# Altium PCB PICkit_2.PcbDoc (part 1 of 2)
Units mil, origin at the board's own origin, x right, y up, seen from the top; angles counter-clockwise.
Board outline 6000 x 4000 mil, 2 copper layers (Top Layer, Bottom Layer); 48 components, 38 nets, 142 pads, 0 vias.
Unrouted connection lines stored in the file: 48.
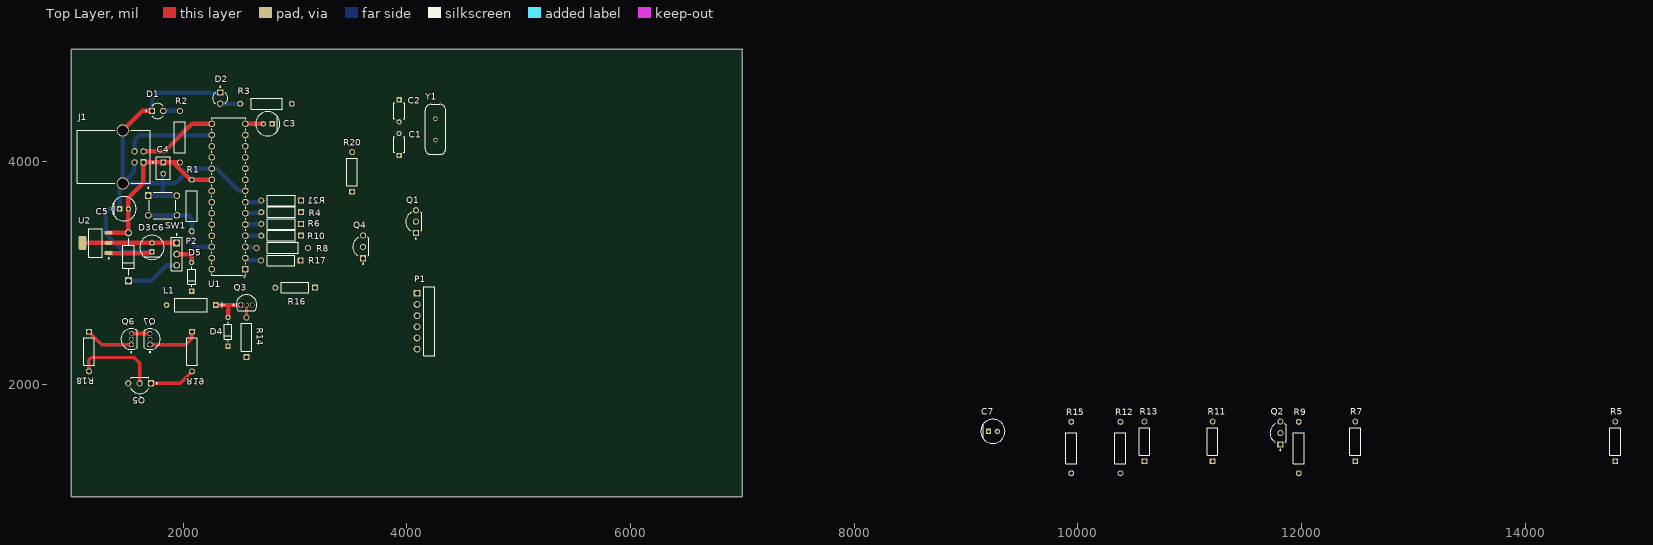
[diagram p0: Top Layer view]
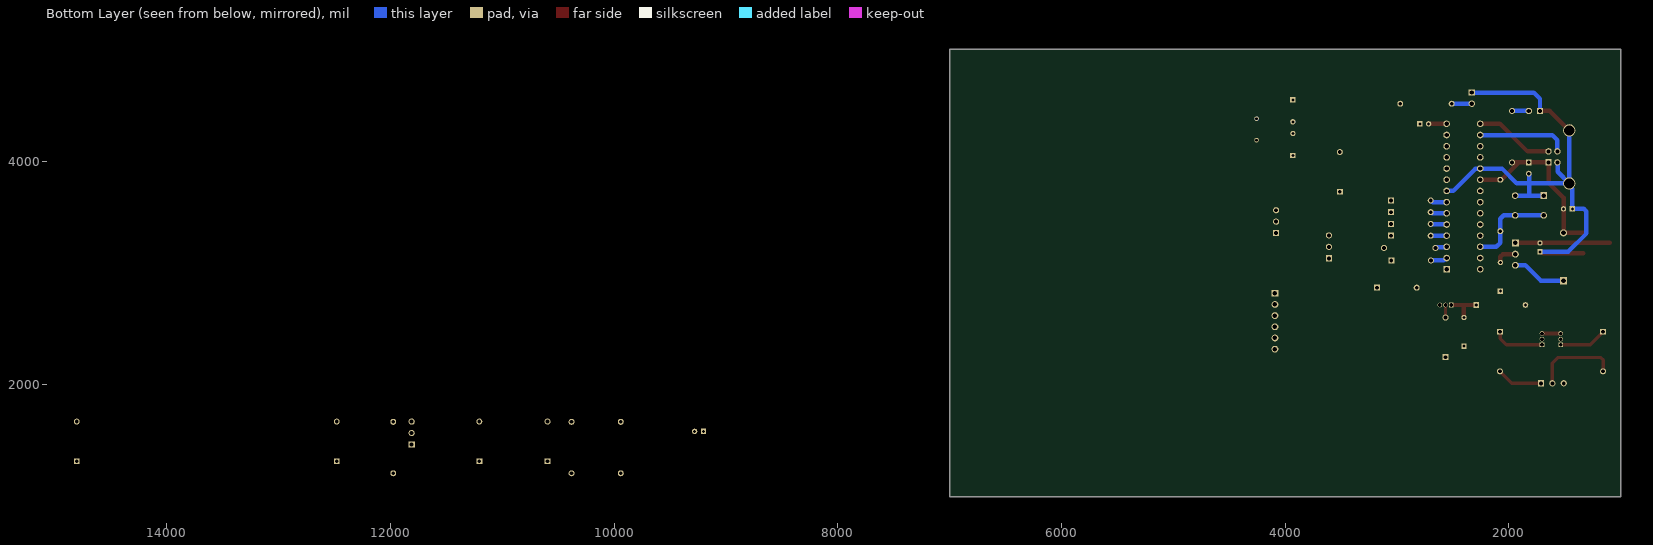
[diagram p1: Bottom Layer view, seen from below]

## Layer stack, top to bottom
Top Solder: solder mask 0.4, Solder Resist, Dk 3.5
Top Layer: signal copper 1.4
Dielectric 1: dielectric 12.6, FR-4, Dk 4.8
Bottom Layer: signal copper 1.4
Bottom Solder: solder mask 0.4, Solder Resist, Dk 3.5

## Board outline
1000,1000 7000,1000 7000,5000 1000,5000

## Design rules (kind name [scope] priority, off if disabled: settings)
Clearance [All] p1: gap=10 ignorepadtopadclearanceinfootprint=FALSE except(0: Arc-Hole Track-Hole SMDPad-Hole THPad-Hole Via-Hole Fill-Hole Poly-Hole Region-Hole Text-Hole; 8: Arc-SMDPad Arc-THPad Track-SMDPad Track-THPad SMDPad-SMDPad SMDPad-THPad THPad-THPad)
PolygonConnect [All] p1: connectstyle=Relief reliefconductorwidth=10 reliefentries=4 polygonreliefangle="90 Angle" airgapwidth=10
RoutingVias [All] p1: holewidth=28 width=50 viastyle="Through Hole" minholewidth=28 minwidth=50 maxholewidth=28 maxwidth=50
SolderMaskExpansion [All] p1: expansion=4 istentingtop=FALSE
Width [All] p1: maxlimit=200 minlimit=10 preferedwidth=30 minimp=50.000000 maximp=50.000000 favimp=50.000000
30 further rules are at their usual default settings.

## Components (designator, comment, footprint, x,y, rotation, side; value= is the part's Value field where it differs from the comment)
C1 "RCE5C1H220J0K1H03B" FP-RCE0K1-MFG 3930,4150 r90 top
C2 "RCE5C1H220J0K1H03B" FP-RCE0K1-MFG 3930,4451.57 r270 top
C3 "EEUHD1H1R0" FP-RAD-TH-D_5_0_5-L_11_1-MFG 2755,4335 r180 top
C4 "C320C104K5R5TA" CAPR51-254-508X318X736 1820,3940 r270 top
C5 "ECA1HHG100I" FP-RAD-TH-D_5_0_5-L_11_1-MFG 1470,3575 r0 top
C6 "ECA1CM220B" FP-RAD-TH-D_5_0_5-L_11_1-MFG 1720,3230 r90 top
C7 "EEUFM1E470" FP-RAD-TH-D_5_0_5-L_11_1-MFG 9240,1585 r0 top
D1 "HLMP-1719" FP-HLMP-1719-MFG 1770,4450 r0 top
D2 "HLMP-1719" FP-HLMP-1719-MFG 2330,4565 r270 top
D3 "1N5817" FP-DO-41-MFG 1510,3145.91 r90 top
D4 "1N4148" FP-6_560-5004_12-4-MFG 2400,2475 r90 top
D5 "1N4148" FP-6_560-5004_12-4-MFG 2075,2967.05 r90 top
J1 "SS-52300-001" SS-52300-001 1551.02,4039.21 r270 top
L1 "78F681J-RC" IND_BOURNS_78F 2290,2715 r180 top
P1 "ISCP" SMTC-TSW-106-08-X-S-RA 4090,2820 r270 top
P2 "22-28-4033" MOLX-22-28-4033_V 1940,3170 r270 top
Q1 "BC558A" ONSC-TO-92-3-29-11_AM_BL 4080,3460 r90 top
Q2 "BC558A" ONSC-TO-92-3-29-11_AM_BL 11810,1570 r90 top
Q3 "BC548B" ONSC-TO-92-3-29-11 2565,2715 r0 top
Q4 "BC558A" ONSC-TO-92-3-29-11_AM_BL 3607.64,3235.19 r90 top
Q5 "BC558A" ONSC-TO-92-3-29-11_AM_BL 1610,2015 r180 top
Q6 "BC548B" ONSC-TO-92-3-29-11 1535,2410 r90 top
Q7 "BC548B" ONSC-TO-92-3-29-11 1702.21,2410 r90 top
R1 "CF14JT10K0" CF14JT10K0 2075,3600 r90 top
R2 "1-1623728-6" CF14JT10K0 1970,4215 r90 top
R3 "1-1623728-6" CF14JT10K0 2745,4515 r180 top
R4 "MFR-25FBF52-1K" RESA60-630X240 2875,3545 r180 top
R5 "MFR-25FBF52-1K" RESA60-630X240 14805,1495 r90 top
R6 "MFR-25FBF52-1K" RESA60-630X240 2875,3440 r180 top
R7 "MFR-25FBF52-1K" RESA60-630X240 12480,1495 r90 top
R8 "" CF14JT10K0 2890,3225 r180 top
R9 "" CF14JT10K0 11975,1435 r90 top
R10 "MFR-25FBF52-1K" RESA60-630X240 2875,3335 r180 top
R11 "MFR-25FBF52-1K" RESA60-630X240 11205,1495 r90 top
R12 "" CF14JT10K0 10380,1435 r90 top
R13 "MFR-25FBF52-1K" RESA60-630X240 10595,1495 r90 top
R14 "MFR-25FBF52-1K" RESA60-630X240 2565,2425.79 r90 top
R15 "" CF14JT10K0 9940,1435 r90 top
R16 "MFR-25FBF52-1K" RESA60-630X240 3000,2870 r180 top
R17 "MFR-25FBF52-1K" RESA60-630X240 2872.54,3113.99 r180 top
R18 "MFR-25FBF52-1K" RESA60-630X240 1155.97,2298.78 r270 top
R19 "MFR-25FBF52-1K" RESA60-630X240 2078.89,2298.78 r270 top
R20 "MFR-25FBF52-1K" RESA60-630X240 3510,3905 r90 top
R21 "MFR-25FBF52-1K" RESA60-630X240 2875,3650 r180 top
SW1 "TS02-66-60-BK-100-LCR-D" SW_TS02-66-60-BK-100-LCR-D 1815,3605 r0 top
U1 "PIC18F2550-I/SP" PIC18F2550-I/SP 2555,3035 r180 top
U2 "AZ1117IH-3.3TRG1" FP-SOT223-IPC_B 1215,3270 r180 top
Y1 "ECS-200-20-4X" XTAL_ECS-200-20-4X 4255,4285 r90 top

## Footprints (in the part's own frame and the unit in brackets; to place one, negate y for a bottom-side part, rotate by r counter-clockwise, add the part's x,y. Pads: shape width x height; smd on the part's side, far side on the other; paste and mask are expansions set on the pad)
CAPR51-254-508X318X736 [mm] "THD, 2-Leads, Body 5.08x3.18mm"
  rect 1.3x1.3 hole 0.8: 1(-1.27,0)
  round 1.3 hole 0.8: 2(1.27,0)
  silkscreen extent -2.54,-1.59 2.54,1.59, body extent -2.54,-1.59 2.54,1.59, height 7.36
CF14JT10K0 [mm]
  round 1.35 hole 0.85: 1(-5.715,0) 2(5.969,0)
  silkscreen extent -3.5,-1.25 3.5,1.25, body extent -6.02,-1.29 6.27,1.29, height 2.59
FP-6_560-5004_12-4-MFG [mm]
  rect 1.2x1.2 hole 0.7 paste-1000 mask+0: 1(-3.25,0)
  round 1.2 hole 0.7 paste-1000 mask+0: 2(3.25,0)
  silkscreen extent -2.25,-0.87 2.25,0.87, body extent -3.95,-0.97 3.95,0.97, height 0.25
FP-DO-41-MFG [mm]
  rect 1.6x1.6 hole 1.05 paste-1000 mask+0: 1(-5.438,0)
  round 1.6 hole 1.05 paste-1000 mask+0: 2(5.438,0)
  silkscreen extent -4.24,-1.36 4.24,1.36
FP-HLMP-1719-MFG [mm]
  rect 1.45x1.45 hole 0.95 paste-1000 mask+0: 1(-1.27,0)
  round 1.45 hole 0.95 paste-1000 mask+0: 2(1.27,0)
  silkscreen extent -2.67,-1.71 1.3,1.71, body extent -2.22,-2.22 2.22,2.22, height 0.25
FP-RAD-TH-D_5_0_5-L_11_1-MFG [mm]
  rect 1.2x1.2 hole 0.7 paste-1000 mask+0: 1(-1,0)
  round 1.2 hole 0.7 paste-1000 mask+0: 2(1,0)
  silkscreen extent -2.75,-2.75 2.75,2.75, body extent -2.85,-2.85 2.85,2.85, height 0.25
FP-RCE0K1-MFG [mm]
  rect 1.2x1.2 hole 0.7 paste-1000 mask+0: 1(-2.5,0)
  round 1.2 hole 0.7 paste-1000 mask+0: 2(2.5,0)
  silkscreen extent -1.8,-1.25 1.8,1.25, body extent -3.2,-1.35 3.2,1.35, height 0.25
FP-SOT223-IPC_B [mm]
  rect 1.86x0.872 smd paste+0 mask+0: 1(-2.976,2.3)
  rrect100% 1.86x0.872 smd paste+0 mask+0: 2(-2.976,0) 3(-2.976,-2.3)
  rrect47% 1.86x3.172 smd paste+0 mask+0: 4(2.976,0)
  silkscreen extent -3.1,-3.25 1.5,3.62, body extent -4.16,-3.5 4.16,3.5, height 0.25
IND_BOURNS_78F [mil]
  rect 50x50 hole 30 mask+0: 1(0,0)
  round 50 hole 30 mask+0: 2(440,0)
  silkscreen extent -85,-60 365,60, body extent -10,-55 450,55, height 110
MOLX-22-28-4033_V [mm] "THD, 3-Leads, Body 7.62x2.49mm, Pitch 2.54mm"
  rect 1.55x1.55 hole 1.02: 1(-2.54,0)
  round 1.55 hole 1.02: 2(0,0) 3(2.54,0)
  silkscreen extent -4.58,-1.24 3.81,1.24, body extent -3.81,-1.24 3.81,1.24, height 8.38
ONSC-TO-92-3-29-11 [mm] "TO, 3-Leads, Body Dia 4.7mm, Pitch 1.27mm"
  rect 1.05x1.05 hole 0.8: 1(-1.27,0)
  round 1.05 hole 0.8: 2(0,0) 3(1.27,0)
  silkscreen extent -3.07,-1.34 2.35,2.35, body extent -2.35,-1.33 2.36,2.36, height 7.87
ONSC-TO-92-3-29-11_AM_BL [mm] "TO, 3-Leads, Body Dia 4.7mm, Pitch 2.6mm"
  rect 1.4x1.4 hole 0.9: 1(-2.6,0)
  round 1.4 hole 0.9: 2(0,0) 3(2.6,0)
  silkscreen extent -3.97,-1.34 2.13,2.35, body extent -2.84,-1.34 2.84,2.35, height 5.33
PIC18F2550-I/SP [mil] "PIC18F2550-I/SP"
  rect 59x59 hole 39 mask+0: 1(0,0)
  round 59 hole 39 mask+0: 2(0,-100) 3(0,-200) 4(0,-300) 5(0,-400) 6(0,-500) 7(0,-600) 8(0,-700) 9(0,-800) 10(0,-900) 11(0,-1000) 12(0,-1100) 13(0,-1200) 14(0,-1300) 15(300,-1300) 16(300,-1200) 17(300,-1100) 18(300,-1000) 19(300,-900) 20(300,-800) 21(300,-700) 22(300,-600) 23(300,-500) 24(300,-400) 25(300,-300) 26(300,-200) 27(300,-100) 28(300,0)
  silkscreen extent -3,-1355 303,55, body extent -5,-1350 314,50, height 205
RESA60-630X240 [mm] "Axial Resistor, 2-Leads, Dia 2.4mm, Body Length 6.3mm"
  rect 1.35x1.35 hole 0.85: 1(-4.5,0)
  round 1.35 hole 0.85: 2(4.5,0)
  silkscreen extent -3.15,-1.2 3.15,1.2, body extent -3.15,-1.2 3.15,1.2, height 2.4
SMTC-TSW-106-08-X-S-RA [mm] ".025 SQ Post Terminal Strip Assembly, 1x6 Pins, Right Angle, 2.54mm Pitch, Male"
  rect 1.55x1.55 hole 1.02: 1(0,0)
  round 1.55 hole 1.02: 2(2.54,0) 3(5.08,0) 4(7.62,0) 5(10.16,0) 6(12.7,0)
  silkscreen extent -1.46,1.52 14.16,4.06, body extent -1.27,-0.32 13.97,9.9, height 3.05
SS-52300-001 [mm] "USB-B (USB TYPE-B) USB 2.0 Receptáculo Conector 4 Posiciones Orificio pasante"
  rect 1.45x1.45 hole 0.92: 1(1.25,2.355)
  round 1.45 hole 0.92: 2(-1.25,2.355) 3(-1.25,0.355) 4(1.25,0.355)
  round 2.8 hole 2.3: 5(6.02,-2.355) 6(-6.02,-2.355)
  silkscreen extent -6.02,-12.63 6.02,4.64, body extent -7.44,-12.7 7.49,3.8, height 11.25
SW_TS02-66-60-BK-100-LCR-D [mm]
  rect 1.508x1.508 / inner round 1.508 / far side rect 1.508x1.508 hole 1: 1(-3.25,2.25)
  round 1.508 hole 1: 2(3.25,2.25) 3(-3.25,-2.25) 4(3.25,-2.25)
  silkscreen extent -3.35,-3 3,4.1, body extent -3.95,-2.95 3.95,3.05, height 6
XTAL_ECS-200-20-4X [mm]
  round 1.03 hole 0.63: 1(-2.44,0) 2(2.44,0)
  silkscreen extent -5.68,-2.33 5.68,2.33, body extent -5.68,-2.32 5.68,2.32, height 3.5

## Part data
C1 C2: library part CMP-06035-047580-1, "Cap Ceramic 22pF 50V C0G ±5% Radial 5mm +125°C Automotive Bulk", Capacitance=22pF, Case/Package=Radial, Dielectric=C0G, Manufacturer=Murata, Max Operating Temperature=125°C, Min Operating Temperature=-55°C, Package Quantity=500, Ratings=AEC-Q200, Resistor Type=Ceramic, Supplier Part Number 1=490-12836-ND, Tolerance=5%, Voltage Rating=50V, Category="Ceramic Capacitors", ComponentLink1Description=https://datasheet.ciiva.com/18700/product-18700305.pdf?src-supplier=Digi-Key, ComponentLink1URL=https://datasheet.ciiva.com/18700/product-18700305.pdf?src-supplier=Digi-Key, Height=3.5mm, Height - Seated (Max)=0.138inch, Lead Diameter=0.5mm, Lead Pitch=0.197inch, Lead/Base Style="Formed Leads", Length=0.142inch, Manufacturer Part Number=RCE5C1H220J0K1H03B, Mount="Through Hole", Packaging=Bulk, Pricing 1="1=0.47000, 10=0.33100, 50=0.25020, 100=0.21790, 500=0.16140, 1000=0.13719, 2500=0.12912, 5000=0.12105 (USD)", RoHS=Yes, RoHS Compliant=Yes, Stock 1=685, Supplier 1=Digi-Key, Termination=Radial, Voltage Rating (DC)=50V, Width=0.098inch
C3: library part CMP-05427-001020-1, "Aluminum Electrolytic Capacitors (Radial Lead Type) AEC-Q200 Qualified 1uF ±20% 50V", Capacitance=1uF, Case/Package=Radial, Max Operating Temperature=105°C, Min Operating Temperature=-55°C, Package Quantity=200, Ripple Current=10mA, Tolerance=20%, Voltage=50V, Construction=RADIAL, Diameter=5mm, Height=11mm, Height - Seated (Max)=0.492inch, Lead Diameter=0.5mm, Lead Pitch=2.5mm, Lead/Base Style=Straight, Length=12.5mm, Life (Hours)=1000Hour, Mount="Through Hole", Number of Pins=2, Packaging=Bulk, Polarity=Polar, REACH SVHC="No SVHC", Ripple Current (AC)=10mA, RoHS Compliant=Yes, Series=HD, Termination=Radial, Voltage Rating=50V, Voltage Rating (DC)=50V
C4: library part CMP-1664-00004-1, "Radial Leaded Multilayer Ceramic Capacitor, 0.1 uF, +/- 10%, 50 V, -55 to 125 degC, 2-Pin THD, RoHS, Tape and Reel", Capacitance=100nF, Case/Package=Radial, Case\Package=SOT-23-5, Dielectric=X7R, Dielectric Material=Ceramic, Dropout Voltage="260 mV", Manufacturer=KEMET, Max Input Voltage="8 V", Max Operating Temperature="85 degC", Max Power Dissipation="250 mW", Min Operating Temperature="-40 degC", Output Current="150 mA", Output Voltage="5 V", Package Quantity=3000, Supplier Part Number 1=399-4264-ND, Tolerance=10%, Voltage=50V, Category="Ceramic Capacitors", ComponentLink1Description="Manufacturer URL", ComponentLink1URL=http://www.kemet.com/, ComponentLink2Description=Datasheet, ComponentLink2URL=http://www.kemet.com/docfinder?Partnumber=C320C104K5R5TA, ComponentLink3Description=https://datasheet.ciiva.com/7817/1732702-7817354.pdf?src-supplier=Element14, ComponentLink3URL=https://datasheet.ciiva.com/7817/1732702-7817354.pdf?src-supplier=Element14, ComponentLink4Description=https://datasheet.ciiva.com/27052/1570161-27052544.pdf?src-supplier=Jameco, ComponentLink4URL=https://datasheet.ciiva.com/27052/1570161-27052544.pdf?src-supplier=Jameco, ComponentLink5Description=https://datasheet.ciiva.com/11786/0900766b80717e24-11786584.pdf?src-supplier=RSComponents, ComponentLink5URL=https://datasheet.ciiva.com/11786/0900766b80717e24-11786584.pdf?src-supplier=RSComponents, ComponentLink6Description=https://datasheet.ciiva.com/39122/f3101-goldmax-39122993.pdf?src-supplier=Onlinecomponents.com, ComponentLink6URL=https://datasheet.ciiva.com/39122/f3101-goldmax-39122993.pdf?src-supplier=Onlinecomponents.com, ComponentLink7Description=https://datasheet.ciiva.com/7817/f3101-goldmax-7817514.pdf?src-supplier=Element14, ComponentLink7URL=https://datasheet.ciiva.com/7817/f3101-goldmax-7817514.pdf?src-supplier=Element14, ComponentLink8Description=https://datasheet.ciiva.com/14585/70095037-14585005.pdf?src-supplier=Allied+Electronics, ComponentLink8URL=https://datasheet.ciiva.com/14585/70095037-14585005.pdf?src-supplier=Allied+Electronics, ComponentLink9Description=https://datasheet.ciiva.com/5389/f3101-goldmax-334604-5389886.pdf?src-supplier=Mouser, ComponentLink9URL=https://datasheet.ciiva.com/5389/f3101-goldmax-334604-5389886.pdf?src-supplier=Mouser, Construction=RADIAL, DatasheetVersion=Dec-15, Depth=3.18mm, Dissipation Factor=2.5%, Height="1.3 mm", Height - Seated (Max)=0.26inch, Lead Diameter=0.51mm, Lead Free="Lead Free", Lead Length=7mm, Lead Pitch=2.54mm, Lead/Base Style=Straight, Length="3 mm", Manufacturer Part Number=C320C104K5R5TA, Mount="Surface Mount", Number of Pins=2, Outputs=1, PackageDescription="2-Pin Through Hole Device, Body 5.08 x 3.18 mm, Pitch 2.54 mm", PackageReference=CAPR51-254-508X318X736, Packaging="Tape and Reel", Pins=5, Pricing 1="1=0.22000, 10=0.15200, 50=0.10100, 100=0.08580, 500=0.06060, 1000=0.05302, 2500=0.05050, 5000=0.04671 (USD)", Radiation Hardening=No, Reach SVHC Compliant=Yes, Resistor Type=Ceramic, RoHS=Yes, RoHS Compliant=Yes, RoHSCompliant=true, Series="GoldMax 300 Comm X7R", Stock 1=268489, Supplier 1=Digi-Key, Termination=Radial, Voltage Rating=50V, Voltage Rating (DC)=50V, Width="1.8 mm"
C5: library part CMP-05427-000260-1, "Aluminum Electrolytic Capacitors (Radial Lead Type) AEC-Q200 Qualified 10uF ±20% 50V", Capacitance=10uF, Case/Package=Radial, Leakage Current=3uA, Manufacturer=Panasonic, Max Operating Temperature=105°C, Min Operating Temperature=-55°C, Package Quantity=2000, Ripple Current=39mA, Supplier Part Number 1=P19445CT-ND, Tolerance=20%, Voltage Rating=50V, Category="Aluminum Electrolytic Capacitors", ComponentLink1Description=https://datasheet.ciiva.com/26882/getdatasheetpartid-479260-26882746.pdf?src-supplier=Verical, ComponentLink1URL=https://datasheet.ciiva.com/26882/getdatasheetpartid-479260-26882746.pdf?src-supplier=Verical, ComponentLink2Description=https://datasheet.ciiva.com/11680/aba0000ce26-11680984.pdf?src-supplier=Avnet, ComponentLink2URL=https://datasheet.ciiva.com/11680/aba0000ce26-11680984.pdf?src-supplier=Avnet, Construction=RADIAL, Contact Plating=Tin, Diameter=5mm, Height=11mm, Height - Seated (Max)=0.472inch, Lead Diameter=0.5mm, Lead Free="Lead Free", Lead Pitch=2.5mm, Lead/Base Style=Straight, Length=11mm, Life (Hours)=1000Hour, Manufacturer Part Number=ECA1HHG100I, Mount="Through Hole", Packaging="Ammo Pack", Polarity=Polar, Pricing 1="1=0.33000, 10=0.22800, 50=0.15200, 100=0.12920, 500=0.09120, 1000=0.07980 (USD)", Radiation Hardening=No, RoHS=Yes, RoHS Compliant=Yes, Series=NHG, Stock 1=46120, Supplier 1=Digi-Key, Termination=Radial, Voltage Rating (DC)=50V
C6: library part CMP-05427-000115-1, "Aluminum Electrolytic Capacitors (Radial Lead Type) 22uF ±20% 16V", Capacitance=22uF, Case/Package=Radial, Manufacturer=Panasonic, Manufacturer Part Number=ECA-1CM220B, Max Operating Temperature=85°C, Min Operating Temperature=-40°C, Package Quantity=2000, Ripple Current=75mA, Supplier Part Number 1=10-ECA-1CM220BCT-ND, Tolerance=20%, Voltage Rating=16V, Category="Aluminum Electrolytic Capacitors", ComponentLink1Description=http://www.mouser.com/ds/2/315/ABA0000C1218-1131230.pdf?src-supplier=Mouser, ComponentLink1URL=http://www.mouser.com/ds/2/315/ABA0000C1218-1131230.pdf?src-supplier=Mouser, ComponentLink2Description=http://www.onlinecomponents.com/datasheet/eca-1cm220b.aspx?p=44446502&src-supplier=Onlinecomponents.com, ComponentLink2URL=http://www.onlinecomponents.com/datasheet/eca-1cm220b.aspx?p=44446502&src-supplier=Onlinecomponents.com, ComponentLink3Description=https://media.digikey.com/pdf/Data%20Sheets/Panasonic%20Capacitors%20PDFs/ECA-xxM%20Spec.pdf?src-supplier=Digi-Key, ComponentLink3URL=https://media.digikey.com/pdf/Data%20Sheets/Panasonic%20Capacitors%20PDFs/ECA-xxM%20Spec.pdf?src-supplier=Digi-Key, ComponentLink4Description=http://industrial.panasonic.com/www-data/pdf/ABA0000/ABA0000CE12.pdf?src-supplier=Avnet, ComponentLink4URL=http://industrial.panasonic.com/www-data/pdf/ABA0000/ABA0000CE12.pdf?src-supplier=Avnet, Diameter=5mm, Height=11mm, Height - Seated (Max)=0.472inch, Lead Diameter=0.5mm, Lead Pitch=5mm, Lead/Base Style=Straight, Length=11mm, Life (Hours)=2000Hour, Mount="Through Hole", Packaging="Ammo Pack", Polarity=Polar, Pricing 1="1=0.28000, 10=0.19300, 50=0.11580, 100=0.09780, 500=0.06696, 1000=0.05922 (USD)", Radiation Hardening=No, RoHS=Yes, RoHS Compliant=Yes, Series=M, Stock 1=5985, Supplier 1=Digi-Key, Termination=Radial, Voltage Rating (DC)=16V
C7: library part CMP-05427-000601-1, "Aluminum Electrolytic Capacitors (Radial Lead Type) 47uF ±20% 25V", Capacitance=47uF, Case/Package=Radial, ESR (Equivalent Series Resistance)=300mR, Manufacturer=Panasonic, Max Operating Temperature=105°C, Min Operating Temperature=-40°C, Package Quantity=200, Ripple Current=280mA, Supplier Part Number 1=P12923-ND, Tolerance=20%, Voltage=25V, Category="Aluminum Electrolytic Capacitors", ComponentLink1Description=https://datasheet.ciiva.com/11777/0900766b805f3abe-11777793.pdf?src-supplier=RSComponents, ComponentLink1URL=https://datasheet.ciiva.com/11777/0900766b805f3abe-11777793.pdf?src-supplier=RSComponents, ComponentLink2Description=https://datasheet.ciiva.com/46396/654842-46396775.pdf?src-supplier=Element14, ComponentLink2URL=https://datasheet.ciiva.com/46396/654842-46396775.pdf?src-supplier=Element14, ComponentLink3Description=https://datasheet.ciiva.com/11680/aba0000ce108-11680078.pdf?src-supplier=Avnet, ComponentLink3URL=https://datasheet.ciiva.com/11680/aba0000ce108-11680078.pdf?src-supplier=Avnet, ComponentLink4Description=https://datasheet.ciiva.com/92/aba0000ce108-92343.pdf?src-supplier=Digi-Key, ComponentLink4URL=https://datasheet.ciiva.com/92/aba0000ce108-92343.pdf?src-supplier=Digi-Key, ComponentLink5Description=https://datasheet.ciiva.com/48542/eeufm-series-eng-tds-48542709.pdf?src-supplier=Distrelec, ComponentLink5URL=https://datasheet.ciiva.com/48542/eeufm-series-eng-tds-48542709.pdf?src-supplier=Distrelec, ComponentLink6Description=https://datasheet.ciiva.com/43458/654842-43458220.pdf?src-supplier=Farnell, ComponentLink6URL=https://datasheet.ciiva.com/43458/654842-43458220.pdf?src-supplier=Farnell, Construction=RADIAL, Contact Plating=Tin, Diameter=5mm, Dissipation Factor=0.14%, Features="General Purpose", Height=11mm, Height - Seated (Max)=0.433inch, Impedance=300mR, Lead Diameter=0.5mm, Lead Free="Lead Free", Lead Pitch=2mm, Length=11mm, Life (Hours)=2000Hour, Manufacturer Part Number=EEUFM1E470, Mount="Through Hole", Number of Pins=2, Packaging=Bulk, Pricing 1="1=0.43000, 10=0.29200, 50=0.19440, 100=0.16530, 500=0.11670, 1000=0.10211, 2500=0.09725, 5000=0.08996 (USD)", Radiation Hardening=No, REACH SVHC="No SVHC", Reach SVHC Compliant=Yes, Ripple Current (AC)=280mA, RoHS=Yes, RoHS Compliant=Yes, Series=FM, Stock 1=2, Supplier 1=Digi-Key, Termination=Radial, Voltage Rating=25V, Voltage Rating (DC)=25V
D1: library part CMP-2000-06410-2, "LED YELLOW DIFFUSED T-1 T/H", Case/Package=T, Color=Yellow, Colour=Power, Forward Current=2mA, Forward Voltage=1.8V, Manufacturer=Broadcom, Max Operating Temperature=100°C, Max Power Dissipation=17.5mW, Min Operating Temperature=-40°C, Package=0, Package Quantity=2000, Reverse Voltage=5V, Supplier Part Number 1=516-1309-ND, Temperature="-40°C to +100°C", Temperature Range High=+100°C, Automotive=No, Category=Diode, ComponentLink1Description=https://datasheet.ciiva.com/1244/1715378-1244676.pdf?src-supplier=Element14, ComponentLink1URL=https://datasheet.ciiva.com/1244/1715378-1244676.pdf?src-supplier=Element14, ComponentLink2Description=Datasheet, ComponentLink2URL=https://docs.broadcom.com/docs/AV02-1557EN, ComponentLink3Description=https://datasheet.ciiva.com/15117/getdatasheetpartid-111138-15117505.pdf?src-supplier=Verical, ComponentLink3URL=https://datasheet.ciiva.com/15117/getdatasheetpartid-111138-15117505.pdf?src-supplier=Verical, ComponentLink4Description=https://datasheet.ciiva.com/11773/0900766b800204ad-11773897.pdf?src-supplier=RSComponents, ComponentLink4URL=https://datasheet.ciiva.com/11773/0900766b800204ad-11773897.pdf?src-supplier=RSComponents, ComponentLink5Description=https://datasheet.ciiva.com/19482/253673-19482303.pdf?src-supplier=Jameco, ComponentLink5URL=https://datasheet.ciiva.com/19482/253673-19482303.pdf?src-supplier=Jameco, ComponentLink6Description=https://datasheet.ciiva.com/29334/180618-da-01-en-led-3mm-hlmp-1719-gelb-29334897.pdf?src-supplier=Conrad, ComponentLink6URL=https://datasheet.ciiva.com/29334/180618-da-01-en-led-3mm-hlmp-1719-gelb-29334897.pdf?src-supplier=Conrad, ComponentLink7Description=https://datasheet.ciiva.com/14605/70157746-14605453.pdf?src-supplier=Allied+Electronics, ComponentLink7URL=https://datasheet.ciiva.com/14605/70157746-14605453.pdf?src-supplier=Allied+Electronics, ComponentLink8Description=https://datasheet.ciiva.com/14183/efhlmp17x-47xx-en-14183894.pdf?src-supplier=Distrelec, ComponentLink8URL=https://datasheet.ciiva.com/14183/efhlmp17x-47xx-en-14183894.pdf?src-supplier=Distrelec, Contact Plating=Tin,Matte, Depth=3.43mm, Device Class L1=Optoelectronics, Device Class L2=LEDs, Device Class L3=unset, Diameter=3mm, Digikey Description="LED YELLOW DIFFUSED T-1 T/H", Dominant Wavelength=585nm, Height=6.35mm, Illumination Color=Yellow, Lead Free=Yes, Lead Length=24mm, Led Orientation=Straight, Length=3.43mm, Lens Color=Yellow, Lens Size=3mm, Lens Style=Dome,Round,Circular,Diffused,Colored, Lens Transparency=Diffused, Luminous Intensity=2.1mcd, Manufacturer Part Number=HLMP-1719, Mount="Through Hole", Mouser Description="Standard LEDs - Through Hole Yellow Diffused 585nm 2.1mcd", Number of Elements=1, Number of LEDs=1, Number of Pins=2, Octopart=https://octopart.com/hlmp-1719-broadcom-71130405, Packaging=Bulk, Power Dissipation=17.5mW, Pricing 1="1=0.51000, 10=0.31300, 100=0.18000, 1000=0.14090, 2000=0.12916, 5000=0.11742, 10000=0.10959, 25000=0.10568 (USD)", Radiation Hardening=No, Reach SVHC Compliant=Yes, RoHS=TRUE, RoHS Compliant=Yes, Series=-, Stock 1=77780, Supplier 1=Digi-Key, Temperature Range Low=-40°C, Test Current=2mA, Viewing Angle=50°, Wavelength=585nm
D2: library part CMP-2000-06410-2, "LED YELLOW DIFFUSED T-1 T/H", Case/Package=T, Color=Yellow, Colour=Bussy, Forward Current=2mA, Forward Voltage=1.8V, Manufacturer=Broadcom, Max Operating Temperature=100°C, Max Power Dissipation=17.5mW, Min Operating Temperature=-40°C, Package=0, Package Quantity=2000, Reverse Voltage=5V, Supplier Part Number 1=516-1309-ND, Temperature="-40°C to +100°C", Temperature Range High=+100°C, Automotive=No, Category=Diode, ComponentLink1Description=https://datasheet.ciiva.com/1244/1715378-1244676.pdf?src-supplier=Element14, ComponentLink1URL=https://datasheet.ciiva.com/1244/1715378-1244676.pdf?src-supplier=Element14, ComponentLink2Description=Datasheet, ComponentLink2URL=https://docs.broadcom.com/docs/AV02-1557EN, ComponentLink3Description=https://datasheet.ciiva.com/15117/getdatasheetpartid-111138-15117505.pdf?src-supplier=Verical, ComponentLink3URL=https://datasheet.ciiva.com/15117/getdatasheetpartid-111138-15117505.pdf?src-supplier=Verical, ComponentLink4Description=https://datasheet.ciiva.com/11773/0900766b800204ad-11773897.pdf?src-supplier=RSComponents, ComponentLink4URL=https://datasheet.ciiva.com/11773/0900766b800204ad-11773897.pdf?src-supplier=RSComponents, ComponentLink5Description=https://datasheet.ciiva.com/19482/253673-19482303.pdf?src-supplier=Jameco, ComponentLink5URL=https://datasheet.ciiva.com/19482/253673-19482303.pdf?src-supplier=Jameco, ComponentLink6Description=https://datasheet.ciiva.com/29334/180618-da-01-en-led-3mm-hlmp-1719-gelb-29334897.pdf?src-supplier=Conrad, ComponentLink6URL=https://datasheet.ciiva.com/29334/180618-da-01-en-led-3mm-hlmp-1719-gelb-29334897.pdf?src-supplier=Conrad, ComponentLink7Description=https://datasheet.ciiva.com/14605/70157746-14605453.pdf?src-supplier=Allied+Electronics, ComponentLink7URL=https://datasheet.ciiva.com/14605/70157746-14605453.pdf?src-supplier=Allied+Electronics, ComponentLink8Description=https://datasheet.ciiva.com/14183/efhlmp17x-47xx-en-14183894.pdf?src-supplier=Distrelec, ComponentLink8URL=https://datasheet.ciiva.com/14183/efhlmp17x-47xx-en-14183894.pdf?src-supplier=Distrelec, Contact Plating=Tin,Matte, Depth=3.43mm, Device Class L1=Optoelectronics, Device Class L2=LEDs, Device Class L3=unset, Diameter=3mm, Digikey Description="LED YELLOW DIFFUSED T-1 T/H", Dominant Wavelength=585nm, Height=6.35mm, Illumination Color=Yellow, Lead Free=Yes, Lead Length=24mm, Led Orientation=Straight, Length=3.43mm, Lens Color=Yellow, Lens Size=3mm, Lens Style=Dome,Round,Circular,Diffused,Colored, Lens Transparency=Diffused, Luminous Intensity=2.1mcd, Manufacturer Part Number=HLMP-1719, Mount="Through Hole", Mouser Description="Standard LEDs - Through Hole Yellow Diffused 585nm 2.1mcd", Number of Elements=1, Number of LEDs=1, Number of Pins=2, Octopart=https://octopart.com/hlmp-1719-broadcom-71130405, Packaging=Bulk, Power Dissipation=17.5mW, Pricing 1="1=0.51000, 10=0.31300, 100=0.18000, 1000=0.14090, 2000=0.12916, 5000=0.11742, 10000=0.10959, 25000=0.10568 (USD)", Radiation Hardening=No, Reach SVHC Compliant=Yes, RoHS=TRUE, RoHS Compliant=Yes, Series=-, Stock 1=77780, Supplier 1=Digi-Key, Temperature Range Low=-40°C, Test Current=2mA, Viewing Angle=50°, Wavelength=585nm
D3: library part CMP-12187-000037-1, "DIODE SCHOTTKY 20V 1A DO41", Average Rectified Current=1A, Capacitance=110pF, Case/Package=DO-41, Forward Voltage=450mV, Manufacturer=STMicroelectronics, Max Forward Surge Current (Ifsm)=25A, Max Operating Temperature=150°C, Max Repetitive Reverse Voltage (Vrrm)=20V, Max Reverse Current=500uA, Min Operating Temperature=-65°C, Package Quantity=2000, Supplier Part Number 1=497-4547-1-ND, Category="Rectifier Diodes", ComponentLink1Description=https://datasheet.ciiva.com/16303/cd00001625-16303281.pdf?src-supplier=Future+Electronics, ComponentLink1URL=https://datasheet.ciiva.com/16303/cd00001625-16303281.pdf?src-supplier=Future+Electronics, ComponentLink2Description=https://datasheet.ciiva.com/17094/1n5817-17094606.pdf?src-supplier=Allied+Electronics, ComponentLink2URL=https://datasheet.ciiva.com/17094/1n5817-17094606.pdf?src-supplier=Allied+Electronics, ComponentLink3Description=https://datasheet.ciiva.com/915/cd00001625-915554.pdf?src-supplier=Digi-Key, ComponentLink3URL=https://datasheet.ciiva.com/915/cd00001625-915554.pdf?src-supplier=Digi-Key, ComponentLink4Description=https://datasheet.ciiva.com/915/cd00001625-915553.pdf?src-supplier=Digi-Key, ComponentLink4URL=https://datasheet.ciiva.com/915/cd00001625-915553.pdf?src-supplier=Digi-Key, ComponentLink5Description=https://datasheet.ciiva.com/4715/cd00001625-4715125.pdf?src-supplier=Mouser, ComponentLink5URL=https://datasheet.ciiva.com/4715/cd00001625-4715125.pdf?src-supplier=Mouser, Current Rating=1A, Element Configuration=Single, Forward Current=1A, Height=2.7mm, Lead Free="Lead Free", Length=5.2mm, Manufacturer Part Number=1N5817, Max Reverse Leakage Current=500uA, Max Reverse Voltage (DC)=20V, Max Surge Current=25A, Mount="Through Hole", Number of Pins=2, Output Current=1A, Packaging="Cut Tape", Peak Non-Repetitive Surge Current=25A, Polarity=Standard, Pricing 1="1=0.45000, 10=0.36200, 100=0.24650, 500=0.18490, 1000=0.13867 (USD)", Radiation Hardening=No, REACH SVHC="No SVHC", Reach SVHC Compliant=Yes, RoHS=Yes, RoHS Compliant=Yes, Series=-, Stock 1=14557, Supplier 1=Digi-Key, Voltage Rating (DC)=20V, Weight=0.01lb, Width=2.7mm
D4 D5: library part CMP-02540-000029-2, "DIODE GEN PURP 75V 300MA DO35", Current Rating=150A, Forward Current=300mA, Forward Voltage=1V, Manufacturer="Vishay Vitramon", Manufacturer Part Number=1N4148TR, Max Operating Temperature=175°C, Max Repetitive Reverse Voltage (Vrrm)=100V, Min Operating Temperature=-65°C, Peak Non-Repetitive Surge Current=2A, Power Dissipation=440mW, Supplier Part Number 1=1N4148VSCT-ND, Category="Rectifier Diodes", ComponentLink1Description=http://www.farnell.com/datasheets/2047060.pdf?src-supplier=Farnell, ComponentLink1URL=http://www.farnell.com/datasheets/2047060.pdf?src-supplier=Farnell, ComponentLink2Description=http://www.onlinecomponents.com/datasheet/1n4148tr.aspx?p=12726765&src-supplier=Onlinecomponents.com, ComponentLink2URL=http://www.onlinecomponents.com/datasheet/1n4148tr.aspx?p=12726765&src-supplier=Onlinecomponents.com, ComponentLink3Description=http://www.farnell.com/datasheets/2047060.pdf?src-supplier=Element14, ComponentLink3URL=http://www.farnell.com/datasheets/2047060.pdf?src-supplier=Element14, ComponentLink4Description=http://www.farnell.com/datasheets/2047060.pdf?src-supplier=Newark, ComponentLink4URL=http://www.farnell.com/datasheets/2047060.pdf?src-supplier=Newark, Element Configuration=Single, Lead Free="Lead Free", Mount="Through Hole", Number of Pins=2, Packaging="Tape and Reel", Pricing 1="1=0.10000, 10=0.09200, 100=0.05000, 500=0.03078, 1000=0.02099, 2000=0.01784, 5000=0.01609 (USD)", Reverse Recovery Time=8ns, RoHS=Yes, Stock 1=377746, Supplier 1=Digi-Key
J1: "Usb 2.0 Right Angle Receptacle Type B; Usb 2.0 Right Angle Receptacle Type B", Manufacturer=Bel, Supplier Part Number 1=380-1492-ND, Category=Connectors, ComponentLink1Description=https://belfuse.com/resources/datasheets/stewartconnector/ds-stw-usb-2.0-type-b-connectors.pdf?src-supplier=Digi-Key, ComponentLink1URL=https://belfuse.com/resources/datasheets/stewartconnector/ds-stw-usb-2.0-type-b-connectors.pdf?src-supplier=Digi-Key, Manufacturer Part Number=SS-52300-001, Pricing 1="1=1.07000, 10=0.90800, 25=0.87120, 40=0.85250, 80=0.81550, 230=0.74135, 440=0.66720, 945=0.59307, 2400=0.53747 (USD)", RoHS=No, Stock 1=11394, Supplier 1=Digi-Key
L1: "Ind RF Choke Bobbin Core 680uH 5% 790KHz 60Q-Factor Ferrite 68mA AXL Bag", Case/Package=Axial, Current Rating=68mA, DC Resistance (DCR)=25.3R, Inductance=680uH, Inductance Tolerance=5%, Manufacturer=Bourns, Max Operating Temperature=105°C, Mfr_Name="Bourns Electronics", Min Operating Temperature=-55°C, Package Quantity=5000, Resistor Type=Wirewound, Self Resonant Frequency=2MHz, Supplier Part Number 1=M8156-ND, Test Frequency=790kHz, Category="Fixed Inductors", ComponentLink1Description=https://datasheet.ciiva.com/1069/78f-series-1069895.pdf?src-supplier=Digi-Key, ComponentLink1URL=https://datasheet.ciiva.com/1069/78f-series-1069895.pdf?src-supplier=Digi-Key, ComponentLink2Description=https://datasheet.ciiva.com/3076/78f-series-3076618.pdf?src-supplier=Avnet, ComponentLink2URL=https://datasheet.ciiva.com/3076/78f-series-3076618.pdf?src-supplier=Avnet, ComponentLink3Description=https://datasheet.ciiva.com/1474/78f-series-1474733.pdf?src-supplier=Element14, ComponentLink3URL=https://datasheet.ciiva.com/1474/78f-series-1474733.pdf?src-supplier=Element14, Contact Plating=Tin, Copyright="Copyright (C) 2023 Ultra Librarian. All rights reserved.", Core Material=Ferrite, DC Current=68mA, Diameter=2.79mm, Digi-Key_Part_Number_1=M8156-ND, Lead Diameter=0.51mm, Lead Free="Lead Free", Lead/Base Style=Axial, Length=7.11mm, Manufacturer Part Number=78F681J-RC, Manufacturer_Part_Number=78F681J-RC, Max DC Current=68mA, Military Standard=Not, Mount="Through Hole", Packaging=Bag, Pricing 1="1=0.31000, 10=0.27900, 25=0.24440, 50=0.20940, 100=0.19200, 250=0.17456, 500=0.16408, 1000=0.12568, 2500=0.11870 (USD)", Q Factor=60, Reach SVHC Compliant=Yes, RefDes=RefDes, RoHS=Yes, RoHS Compliant=Yes, Series=78F, Shielding=Unshielded, Stock 1=11377, Supplier 1=Digi-Key, Termination=Axial, Tolerance=5%, Type=DEV
P1: library part CMP-1024-00390-1, "0.025\" SQ Post Header, Through-hole, Right Angle, -55 to 125 degC, 2.54 mm Pitch, 6-Pin, Male, RoHS", Manufacturer=Samtec, PartNumber=TSW-106-08-L-S-RA, Temperature Range="-55 to 125 degC", ComponentLink1Description="Manufacturer URL", ComponentLink1URL=http://www.samtec.com, ComponentLink2Description=Datasheet, ComponentLink2URL=http://www.samtec.com/documents/webfiles/pdf/TSW_TH.PDF, ComponentLink3Description="Package Specification", ComponentLink3URL=http://www.samtec.com/documents/webfiles/cpdf/TSW-XXX-XX-XXX-X-XX-XXX-MKT.pdf, DatasheetVersion=F-214, Mounting Technology=Through-hole, Orientation="Right Angle", PackageDescription=".025[0.64] SQ. Post Terminal Strip Assembly", PackageReference=TSW-106-08-X-S-RA, PackageVersion="DM, 8/1988", Pitch="2.54 mm", RoHS=True
P2: library part CMP-1676-00001-5, "Male Header, Pitch 2.54 mm, 1 x 3 Position, Height 8.38 mm, Tail Length 3.18 mm, RoHS, Bulk", Color=Black, Contact Resistance=20mR, Current Rating="4 A", Flammability Rating="UL94 V-0", Manufacturer=Molex, Max Operating Temperature="75 degC", Max Voltage Rating (AC)=250V, Min Operating Temperature="0 degC", Package Quantity=1, Supplier Part Number 1=WM50016-03-ND, Voltage Rating="250 V", Action=Selec_VCC, Category="Headers and Wire Housings", Colour=Black, ComponentLink1Description="Manufacturer URL", ComponentLink1URL=http://www.molex.com/, ComponentLink2Description=Datasheet, ComponentLink2URL=http://www.molex.com/pdm_docs/sd/022284033_sd.pdf, ComponentLink3Description=https://datasheet.ciiva.com/6814/022284363-sd-6814049.pdf?src-supplier=Digi-Key, ComponentLink3URL=https://datasheet.ciiva.com/6814/022284363-sd-6814049.pdf?src-supplier=Digi-Key, ComponentLink4Description=https://datasheet.ciiva.com/30254/32400022284033-pcb-headers-30254252.pdf?src-supplier=Onlinecomponents.com, ComponentLink4URL=https://datasheet.ciiva.com/30254/32400022284033-pcb-headers-30254252.pdf?src-supplier=Onlinecomponents.com, ComponentLink5Description=https://datasheet.ciiva.com/5157/0022284033-pcb-headers-228089-5157414.pdf?src-supplier=Mouser, ComponentLink5URL=https://datasheet.ciiva.com/5157/0022284033-pcb-headers-228089-5157414.pdf?src-supplier=Mouser, ComponentLink6Description=https://datasheet.ciiva.com/27050/879465-27050600.pdf?src-supplier=Jameco, ComponentLink6URL=https://datasheet.ciiva.com/27050/879465-27050600.pdf?src-supplier=Jameco, ComponentLink7Description=https://datasheet.ciiva.com/1433/1630767-1433688.pdf?src-supplier=Element14, ComponentLink7URL=https://datasheet.ciiva.com/1433/1630767-1433688.pdf?src-supplier=Element14, ComponentLink8Description=https://datasheet.ciiva.com/10089/0022284033-pcb-headers-10089958.pdf?src-supplier=Avnet, ComponentLink8URL=https://datasheet.ciiva.com/10089/0022284033-pcb-headers-10089958.pdf?src-supplier=Avnet, ComponentLink9Description=https://datasheet.ciiva.com/15217/getdatasheetpartid-163440-15217708.pdf?src-supplier=Verical, ComponentLink9URL=https://datasheet.ciiva.com/15217/getdatasheetpartid-163440-15217708.pdf?src-supplier=Verical, Connector Type="Male Pin", Contact Finish=Gold, Contact Material=Brass, Contact Mating Length=0.24inch, Contact Plating=Gold, Contact Type="Male Pin", DatasheetVersion="Rev. G, 01/2012", Depth=2.49mm, Gender=Male, Glow Wire Compliant=Non-compliant, Height="8.38 mm", Housing Color=Black, Housing Material=Nylon, Lead Free="Lead Free", Lead Pitch="0.1 inch", Length="7.62 mm", Manufacturer Part Number=22-28-4033, Max Voltage Rating (DC)=250V, Mount="Through Hole", Mounting Technology="Through Hole", Number of Circuits=3, Number of Contacts=3, Number of Positions=3, Number of Rows=1, Orientation=Straight, PackageDescription="Male Header, Pitch 2.54 mm, 1 x 3 Position, Height 8.38 mm, Tail Length 3.18 mm", PackageReference=22-28-4033, Packaging=Bulk, Pins=3, Pitch=2.54mm, Pricing 1="1=0.27000, 10=0.21800, 100=0.16020 (USD)", Radiation Hardening=No, REACH SVHC=Unknown, RoHS=Yes, RoHS Compliant=Yes, RoHSCompliant=true, Rows=1, Series="KK® 42375", Stock 1=8818, Supplier 1=Digi-Key, Termination=Solder, Voltage Rating (DC)=250V
Q1 Q2 Q4 Q5: library part CMP-1048-01515-1, "Amplifier Transistor, PNP Silicon, 3-Pin TO-92, Pb-Free, Tape and Reel", Manufacturer="On Semiconductor", PartNumber=BC558BRLG, ComponentLink1Description="Manufacturer URL", ComponentLink1URL=http://www.onsemi.com/, ComponentLink2Description=Datasheet, ComponentLink2URL=http://www.onsemi.com/pub_link/Collateral/BC556B-D.PDF, ComponentLink3Description="Package Specification", ComponentLink3URL=http://www.onsemi.com/pub_link/Collateral/MAC97-D.PDF, DatasheetVersion="Rev. 3", IC Continuous (A)=-0.1, Mounting Technology="Through Hole", PackageDescription="3-Pin Transistor Outline, Body 4.825 x 3.685 mm, Pitch 1.27 mm", PackageReference=TO-92-3-29-11_AM_BL, PackageVersion="Rev. AM", Packing="Tape and Reel", Polarity=PNP, RoHS=TRUE
Q3 Q6 Q7: library part CMP-1048-01456-1, "Amplifier Transistor, NPN Silicon, 3-Pin TO-92, Bulk Box", Manufacturer="On Semiconductor", ComponentLink1Description="Manufacturer URL", ComponentLink1URL=http://www.onsemi.com/, ComponentLink2Description=Datasheet, ComponentLink2URL=http://www.onsemi.com/pub_link/Collateral/BC546-D.PDF, ComponentLink3Description="Package Specification", ComponentLink3URL=http://www.onsemi.cn/pub_link/Collateral/2N6426-D.PDF, DatasheetVersion="Rev. 7", fT Min (MHz)=150, IC Continuous (A)=0.1, Mounting Technology="Through Hole", PackageDescription="3-Pin Transistor Outline, Body 4.825 x 3.685 mm, Pitch 1.27 mm", PackageReference=TO-92-3-29-11_AM_SL, PackageVersion="Rev. AM", Packing="Bulk Box", PartNumber=BC548B, Polarity=NPN, RoHS=FALSE
R1: "Res Carbon Film 10K Ohm 5% 0.25W(1/4W) -500ppm/ to 0", Case/Package=Conformal, Manufacturer="Stackpole Electronics", Max Operating Temperature=155°C, Max Power Dissipation=250mW, Min Operating Temperature=-55°C, Package Quantity=1, Resistance=10k, Resistor Type="Carbon Film", Supplier Part Number 1=10KQTR-ND, Temperature Coefficient=-500ppm/°C, Tolerance=5%, Category="Through-Hole Resistors", ComponentLink1Description=http://components.arrow.com/part/dataview/27619991S9848636N1174?src-supplier=Arrow+Electronics, ComponentLink1URL=http://components.arrow.com/part/dataview/27619991S9848636N1174?src-supplier=Arrow+Electronics, ComponentLink2Description=https://www.seielect.com/catalog/SEI-CF_CFM.pdf?src-supplier=Avnet, ComponentLink2URL=https://www.seielect.com/catalog/SEI-CF_CFM.pdf?src-supplier=Avnet, ComponentLink3Description=https://www.seielect.com/catalog/SEI-Packaging.pdf?src-supplier=Digi-Key, ComponentLink3URL=https://www.seielect.com/catalog/SEI-Packaging.pdf?src-supplier=Digi-Key, ComponentLink4Description=http://www.seielect.com/Catalog/SEI-CF_CFM.pdf?src-supplier=Future+Electronics, ComponentLink4URL=http://www.seielect.com/Catalog/SEI-CF_CFM.pdf?src-supplier=Future+Electronics, ComponentLink5Description=https://www.verical.com/server-webapp/html/getDatasheet?partID=367360&src-supplier=Verical, ComponentLink5URL=https://www.verical.com/server-webapp/html/getDatasheet?partID=367360&src-supplier=Verical, Construction=Cylindrical, Contact Plating=Tin,Matte, Diameter=2.3mm, Features="Flame Retardant Coating", Lead Free="Lead Free", Length=6.5mm, Manufacturer Part Number=CF14JT10K0, Military Standard=Not, Mount="Through Hole,Axial", Number of Terminations=2, Packaging="Tape and Reel", Power Rating=250mW, Pricing 2="1=0.10000, 10=0.05600, 25=0.04040, 50=0.03080, 100=0.02260, 250=0.01728, 500=0.01382, 1000=0.01017 (USD)", Radiation Hardening=No, RoHS=Yes, RoHS Compliant=Yes, Series=CF, Stock 2=1407504, Supplier 1=Digi-Key, Supplier 2=Digi-Key, Supplier Part Number 2=CF14JT10K0CT-ND, Termination=Axial
R2 R3: library part CF14JT10K0, "Res Wirewound 330 Ohm 5% 11W ±200ppm/C Ceramic AXL Box/Loose", Case/Package=Ceramic, Manufacturer="TE Connectivity", Max Operating Temperature=350°C, Max Power Dissipation=11W, Min Operating Temperature=-55°C, Package Quantity=100, Resistance=330R, Resistor Type=Wirewound, Supplier Part Number 1=A105636-ND, Temperature Coefficient=200ppm/°C, Tolerance=5%, Category=Uncategorized, ComponentLink1Description=https://datasheet.ciiva.com/8333/eng-ds-1773278-e-8333999.pdf?src-supplier=Avnet, ComponentLink1URL=https://datasheet.ciiva.com/8333/eng-ds-1773278-e-8333999.pdf?src-supplier=Avnet, ComponentLink2Description=https://datasheet.ciiva.com/6532/eng-ds-1773278-f-6532348.pdf?src-supplier=Digi-Key, ComponentLink2URL=https://datasheet.ciiva.com/6532/eng-ds-1773278-f-6532348.pdf?src-supplier=Digi-Key, ComponentLink3Description=https://datasheet.ciiva.com/30070/eng-ds-1773278-e-30070229.pdf?src-supplier=Onlinecomponents.com, ComponentLink3URL=https://datasheet.ciiva.com/30070/eng-ds-1773278-e-30070229.pdf?src-supplier=Onlinecomponents.com, Construction=Rectangular, Depth=9mm, Height=0.394inch, Length=50mm, Manufacturer Part Number=1-1623728-6, Military Standard=Not, Mount="Through Hole", Number of Terminations=2, Packaging=Bulk, Power Rating=11W, Pricing 1="1=1.64000, 10=1.45100, 25=1.33400, 50=1.21700, 100=1.05310, 250=0.88928, 500=0.74888, 1000=0.62250, 5000=0.59676 (USD)", RoHS=Yes, RoHS Compliant=Yes, Series="SBC, CGS", Stock 1=610, Supplier 1=Digi-Key, Termination=Axial, Width=0.354inch
R4 R6 R10: library part CMP-1659-00075-1, "Axial Resistor, 1 KOhm, +/- 1%, 250 mW, -55 to 155 degC, 2-Pin THD, RoHS, Bulk", Case/Package=Axial, Manufacturer=Yageo, Max Operating Temperature="155 degC", Max Power Dissipation=250mW, Min Operating Temperature="-55 degC", Package Quantity=200, Power Rating="250 mW", Resistance=10, Resistor Type="Metal Film", Supplier Part Number 1=1.00KXBK-ND, Temperature Coefficient=100ppm/°C, Tolerance=1%, Voltage Rating="250 V", Voltage Rating (DC)=200V, Case\Package=Axial, Category="Through-Hole Resistors", ComponentLink1Description="Manufacturer URL", ComponentLink1URL=http://www.yageo.com/, ComponentLink2Description=Datasheet, ComponentLink2URL=http://www.yageo.com/documents/recent/Yageo%20LR_MFR_2013.pdf, ComponentLink3Description=https://datasheet.ciiva.com/25646/yageolr-mfr-2013-25646206.pdf?src-supplier=Digi-Key, ComponentLink3URL=https://datasheet.ciiva.com/25646/yageolr-mfr-2013-25646206.pdf?src-supplier=Digi-Key, DatasheetVersion=Apr-13, Lead Diameter=0.6mm, Lead Free="Lead Free", Length="0.248 inch", Manufacturer Part Number=MFR-25FBF52-1K, Mount="Through Hole", Number of Terminations=2, PackageDescription="2-Pin Axial Lead, Dia 2.4 mm, Body Length 6.3 mm", PackageReference=MFR-25, Packaging=Bulk, Pricing 1="1=0.10000, 10=0.08100, 25=0.05600, 50=0.04360, 100=0.03110, 250=0.02428, 500=0.01928, 1000=0.01369, 5000=0.01058 (USD)", RoHS=Yes, RoHS Compliant=Yes, RoHSCompliant=true, Series=MFR, Stock 1=104756, Supplier 1=Digi-Key, Termination=Axial, Width=6.3mm
R5 R7 R11: library part CMP-1659-00075-1, "Axial Resistor, 1 KOhm, +/- 1%, 250 mW, -55 to 155 degC, 2-Pin THD, RoHS, Bulk", Case/Package=Axial, Manufacturer=Yageo, Max Operating Temperature="155 degC", Max Power Dissipation=250mW, Min Operating Temperature="-55 degC", Package Quantity=200, Power Rating="250 mW", Resistance=33, Resistor Type="Metal Film", Supplier Part Number 1=1.00KXBK-ND, Temperature Coefficient=100ppm/°C, Tolerance=1%, Voltage Rating="250 V", Voltage Rating (DC)=200V, Case\Package=Axial, Category="Through-Hole Resistors", ComponentLink1Description="Manufacturer URL", ComponentLink1URL=http://www.yageo.com/, ComponentLink2Description=Datasheet, ComponentLink2URL=http://www.yageo.com/documents/recent/Yageo%20LR_MFR_2013.pdf, ComponentLink3Description=https://datasheet.ciiva.com/25646/yageolr-mfr-2013-25646206.pdf?src-supplier=Digi-Key, ComponentLink3URL=https://datasheet.ciiva.com/25646/yageolr-mfr-2013-25646206.pdf?src-supplier=Digi-Key, DatasheetVersion=Apr-13, Lead Diameter=0.6mm, Lead Free="Lead Free", Length="0.248 inch", Manufacturer Part Number=MFR-25FBF52-1K, Mount="Through Hole", Number of Terminations=2, PackageDescription="2-Pin Axial Lead, Dia 2.4 mm, Body Length 6.3 mm", PackageReference=MFR-25, Packaging=Bulk, Pricing 1="1=0.10000, 10=0.08100, 25=0.05600, 50=0.04360, 100=0.03110, 250=0.02428, 500=0.01928, 1000=0.01369, 5000=0.01058 (USD)", RoHS=Yes, RoHS Compliant=Yes, RoHSCompliant=true, Series=MFR, Stock 1=104756, Supplier 1=Digi-Key, Termination=Axial, Width=6.3mm
R8 R9 R12 R15: library part CF14JT10K0, "Res Thin Film 4.7K Ohm 1% 2/5W ±50ppm/°C Conformal AXL Thru-Hole Ammo Pack", Case/Package=Axial, Manufacturer="Vishay Beyschlag", Manufacturer Part Number=MBA02040C4701FC100, Max Operating Temperature=155°C, Max Power Dissipation=400mW, Min Operating Temperature=-55°C, Package Quantity=5000, Resistance=4k7, Resistance Tolerance=1%, Resistor Type="Thin Film", Supplier Part Number 1=BC3517CT-ND, Temperature Coefficient=50ppm/°C, Voltage Rating=200V, Category="Through-Hole Resistors", ComponentLink1Description=http://www.farnell.com/datasheets/2045688.pdf?src-supplier=Farnell, ComponentLink1URL=http://www.farnell.com/datasheets/2045688.pdf?src-supplier=Farnell, ComponentLink2Description=http://components.arrow.com/part/dataview/43752589S349955N4052?src-supplier=Arrow+Electronics, ComponentLink2URL=http://components.arrow.com/part/dataview/43752589S349955N4052?src-supplier=Arrow+Electronics, ComponentLink3Description=http://www.mouser.com/ds/2/427/mbxsma-239744.pdf?src-supplier=Mouser, ComponentLink3URL=http://www.mouser.com/ds/2/427/mbxsma-239744.pdf?src-supplier=Mouser, ComponentLink4Description=http://www.alliedelec.com/m/d/72a9b4b9281933b6a3b8fa3f9583e3eb.pdf?src-supplier=Allied+Electronics, ComponentLink4URL=http://www.alliedelec.com/m/d/72a9b4b9281933b6a3b8fa3f9583e3eb.pdf?src-supplier=Allied+Electronics, ComponentLink5Description=http://uk.rs-online.com/webdocs/09bb/0900766b809bb010.pdf?src-supplier=RSComponents, ComponentLink5URL=http://uk.rs-online.com/webdocs/09bb/0900766b809bb010.pdf?src-supplier=RSComponents, ComponentLink6Description=http://www.vishay.com/docs/28766/28766.pdf?src-supplier=Avnet, ComponentLink6URL=http://www.vishay.com/docs/28766/28766.pdf?src-supplier=Avnet, ComponentLink7Description=http://www.farnell.com/datasheets/2045688.pdf?src-supplier=Element14, ComponentLink7URL=http://www.farnell.com/datasheets/2045688.pdf?src-supplier=Element14, ComponentLink8Description=http://www.farnell.com/datasheets/2045688.pdf?src-supplier=Newark, ComponentLink8URL=http://www.farnell.com/datasheets/2045688.pdf?src-supplier=Newark, Construction=Cylindrical, Contact Plating=Tin, Diameter=1.6mm, Features="Automotive AEC-Q200", Lead Diameter=0.5mm, Lead Free="Lead Free", Lead Pitch=5mm, Length=3.6mm, Military Standard=Not, Mount="Through Hole", Number of Terminations=2, Packaging="Tape and Reel", Power Rating=400mW, Pricing 1="1=0.46000, 10=0.33100, 100=0.13260, 500=0.09032 (USD)", Radiation Hardening=No, Reach SVHC Compliant=Yes, RoHS=Yes, RoHS Compliant=Yes, Series="MBA/SMA 0204 - Professional", Stock 1=3398, Supplier 1=Digi-Key, Termination=Axial, Tolerance=1%, Voltage Rating (DC)=200V
R13: library part CMP-1659-00075-1, "Axial Resistor, 1 KOhm, +/- 1%, 250 mW, -55 to 155 degC, 2-Pin THD, RoHS, Bulk", Case/Package=Axial, Manufacturer=Yageo, Max Operating Temperature="155 degC", Max Power Dissipation=250mW, Min Operating Temperature="-55 degC", Package Quantity=200, Power Rating="250 mW", Resistance=100k, Resistor Type="Metal Film", Supplier Part Number 1=1.00KXBK-ND, Temperature Coefficient=100ppm/°C, Tolerance=1%, Voltage Rating="250 V", Voltage Rating (DC)=200V, Case\Package=Axial, Category="Through-Hole Resistors", ComponentLink1Description="Manufacturer URL", ComponentLink1URL=http://www.yageo.com/, ComponentLink2Description=Datasheet, ComponentLink2URL=http://www.yageo.com/documents/recent/Yageo%20LR_MFR_2013.pdf, ComponentLink3Description=https://datasheet.ciiva.com/25646/yageolr-mfr-2013-25646206.pdf?src-supplier=Digi-Key, ComponentLink3URL=https://datasheet.ciiva.com/25646/yageolr-mfr-2013-25646206.pdf?src-supplier=Digi-Key, DatasheetVersion=Apr-13, Lead Diameter=0.6mm, Lead Free="Lead Free", Length="0.248 inch", Manufacturer Part Number=MFR-25FBF52-1K, Mount="Through Hole", Number of Terminations=2, PackageDescription="2-Pin Axial Lead, Dia 2.4 mm, Body Length 6.3 mm", PackageReference=MFR-25, Packaging=Bulk, Pricing 1="1=0.10000, 10=0.08100, 25=0.05600, 50=0.04360, 100=0.03110, 250=0.02428, 500=0.01928, 1000=0.01369, 5000=0.01058 (USD)", RoHS=Yes, RoHS Compliant=Yes, RoHSCompliant=true, Series=MFR, Stock 1=104756, Supplier 1=Digi-Key, Termination=Axial, Width=6.3mm